# Altium PCB PCB2.PcbDoc (part 2 of 4)
Units mm, origin at the board's own origin, x right, y up, seen from the top; angles counter-clockwise.
Board outline 247 x 102 mm, 2 copper layers (Top Layer, Bottom Layer); 199 components, 195 nets, 863 pads, 110 vias.
Unrouted connection lines stored in the file: 60.
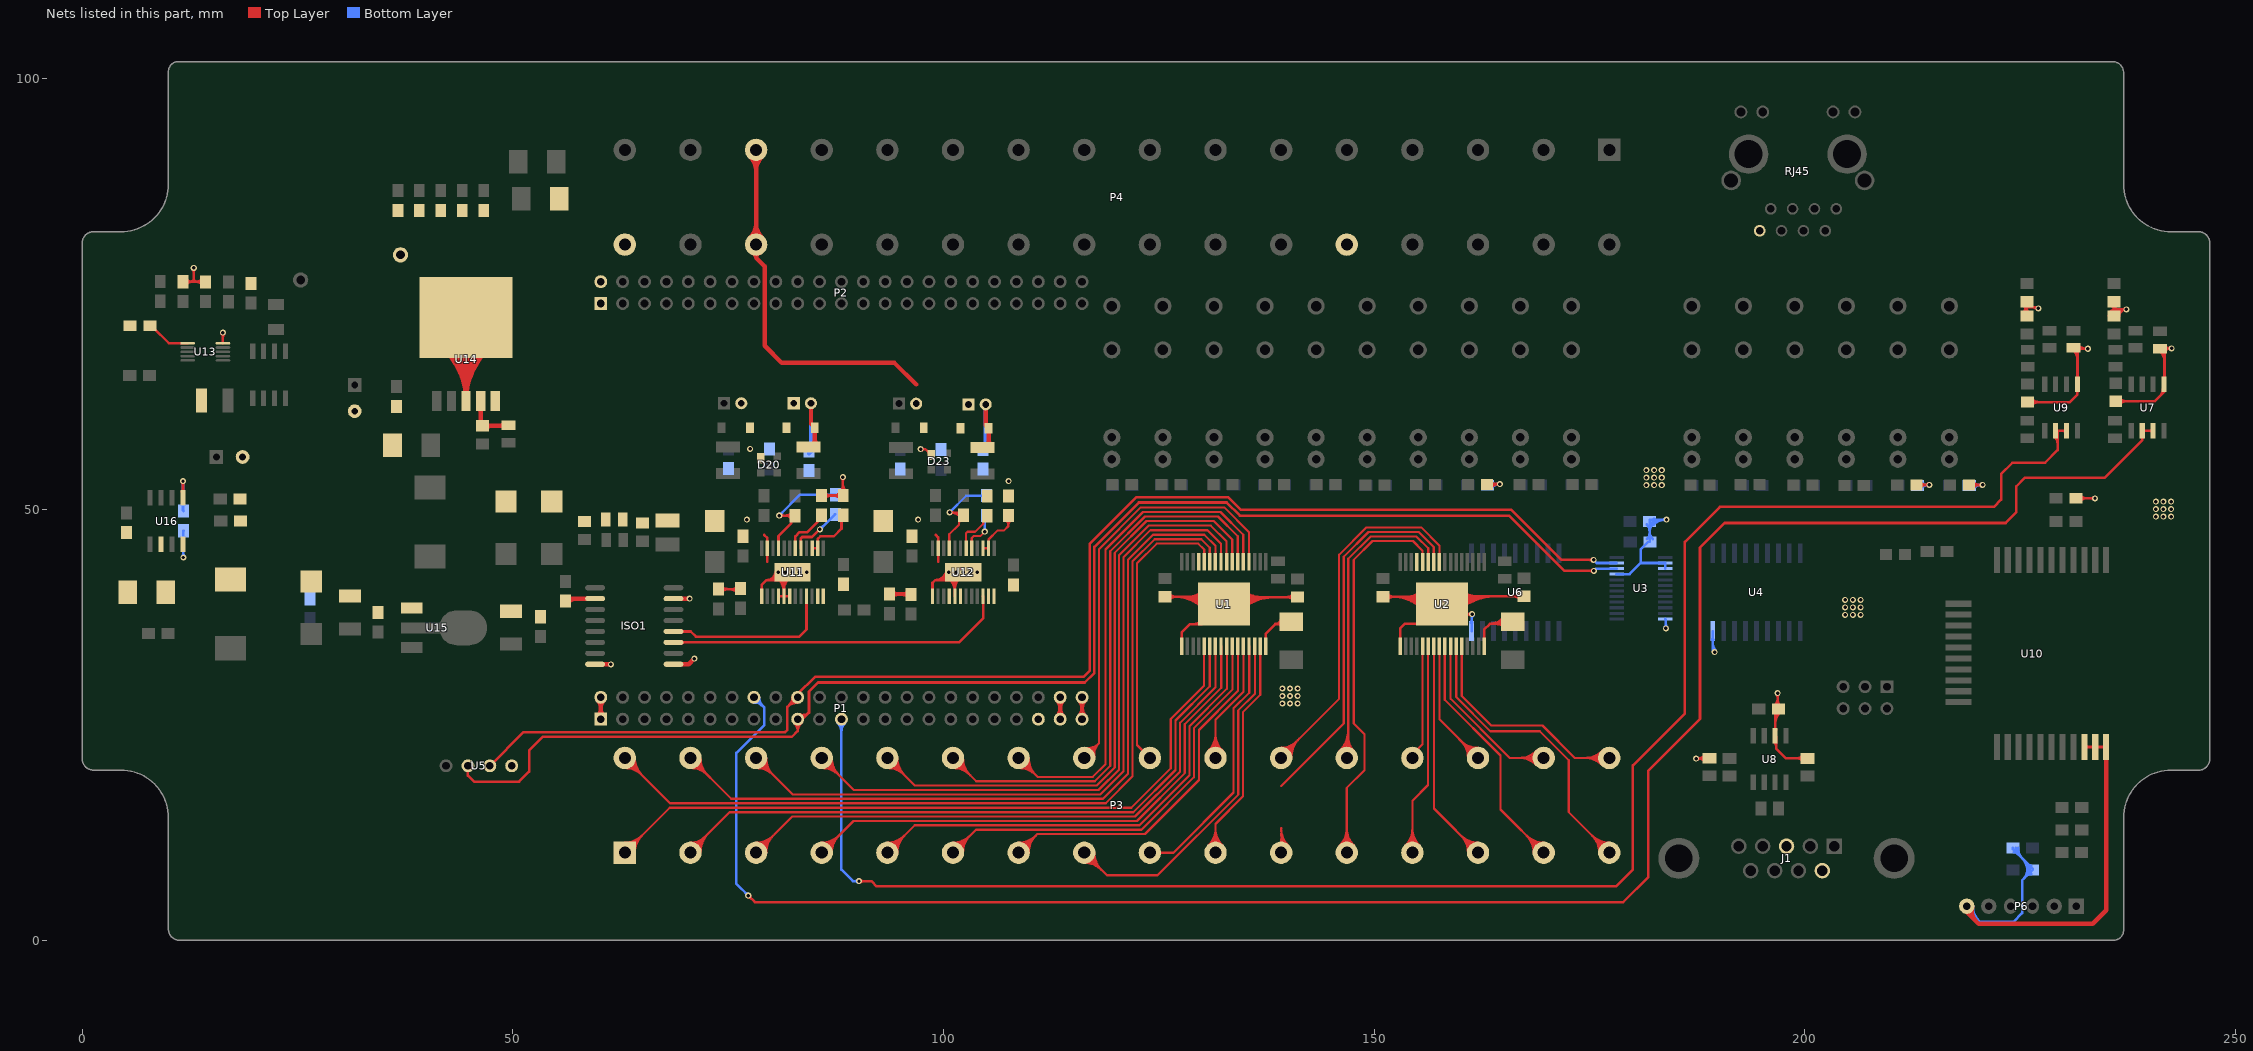
[diagram p2: the nets of this part, all layers, seen from the top]

## Via types
v1: diameter 0.7, hole 0.4, Top Layer to Bottom Layer, 110 vias

## Nets (pads, with @x,y where several pads share a name; then routed paths per layer and width w, separated by ;. In a path a pad name is that pad's centre, name@x,y a point inside that pad or via, vN(x,y) a via of type N, cw(c..) or ccw(c..) an arc to the next point about the centre after c; other vN are vias at no path point) (continued)
DGND: C1.1 C2.1 C3.1 C4.1 C5.2 C6.2 C7.2 C8.1 C9.1 C10.2 C11.1 C12.1 C13.2 C14.1 C15.1 C16.1 C30.2 C38.1 C39.1 C40.1 C41.1 C42.1 C43.2 C44.2 C45.2 C47.2 C48.2 C49.2 C52.1 C53.2 C54.1 C55.1 C57.2 C58.2 C59.1 C60.2 C61.2 CA1.2 CA2.2 D27.2 D28.2 D29.2 ISO1.2 ISO1.8 J1.3 J1.6 L3.1 P1.1 P1.2 P1.43 P1.44 P1.45 P1.46 P2.1 P2.2 P4.10 P4.32 P6.6 R20.2 R23.2 R26.1 R30.2 R49.1 R50.1 R55.2 RJ45.8 TP2.1 U1.0 U1.1 U2.0 U2.1 U3.2 U3.3 U3.12 U3.21 U4.9 U5.4 U6.9 U7.5 U8.2 U9.5 U10.30 U10.31 U10.32 U13.5 U14.0 U14.3 U14.5 U15.1 U16.6 | length 430.1
  Top Layer w0.3: R50.1@11.68,76.45 14.27,76.45 R49.1@14.28,76.44 ; R50.1@12.023,76.107 cw(c12.851,75.279) 12.851,76.45 cw(c12.851,77.621) R50.1@12.023,76.793 ; 12.66,76.45 12.94,76.73 ; v1@12.799,77.919 cw(c12.457,77.577) 12.94,77.577 cw(c13.423,77.577) v1@13.081,77.919 ; v1(12.94,78.06) 12.94,76.73 ; 13.085,76.45 cw(c13.085,75.245) R49.1@13.937,76.097 ; 13.133,76.45 ccw(c13.133,77.587) R49.1@13.937,76.783 ; 13.22,76.45 12.94,76.73 ; v1@16.189,70.389 cw(c15.847,70.047) 16.33,70.047 cw(c16.813,70.047) v1@16.471,70.389 ; U13.5@16.33,69.31 v1(16.33,70.53) ; C3.1@125.7,39.88 129.45,39.88 ; C3.1@126.154,39.526 cw(c127.007,38.673) 127.007,39.88 cw(c127.007,41.087) C3.1@126.154,40.234 ; 126.883,39.88 cw(c126.883,35.276) U1.0@130.598,37.996 ; 127.475,39.88 cw(c127.475,35.709) U1.0@130.84,38.173 ; U1.1@127.66,34.13 127.66,35.77 128.57,36.68 129.92,36.68 U1.0@129.94,36.7 ; 128.066,39.88 cw(c128.066,36.142) U1.0@131.082,38.351 ; 128.389,39.88 ccw(c128.389,42.651) U1.0@130.348,40.692 ; 128.658,39.88 cw(c128.658,36.575) U1.0@131.324,38.528 ; 128.899,36.68 ccw(c128.899,38.221) U1.0@129.989,37.131 ; 129.113,39.88 ccw(c129.113,41.927) U1.0@130.56,40.48 ; 129.249,39.88 cw(c129.249,37.008) U1.0@131.566,38.705 ; U1.0@129.61,39.72 129.45,39.88 ; U1.0@129.61,40.04 129.45,39.88 ; U1.0@129.623,36.68 ccw(c129.623,37.497) U1.0@130.201,36.919 ; U1.0@129.96,40.179 cw(c129.45,40.464) 129.45,39.88 ; U1.0@133.237,38.853 cw(c135.619,36.471) 135.619,39.84 ; U1.0@133.449,38.641 cw(c136.343,35.747) 136.343,39.84 ; U1.0@133.661,38.429 cw(c137.068,35.022) 137.068,39.84 ; U1.0@133.873,38.217 cw(c137.792,34.298) 137.792,39.84 ; U1.0@134.085,38.005 cw(c138.516,33.574) 138.516,39.84 ; U1.0@134.51,40.48 ccw(c136.054,42.024) 136.054,39.84 ; U1.0@134.722,40.692 ccw(c136.778,42.748) 136.778,39.84 ; U1.0@135.15,39.84 C1.1@141.11,39.84 ; C1.1@140.656,39.486 ccw(c139.803,38.633) 139.803,39.84 ccw(c139.803,41.047) C1.1@140.656,40.194 ; C4.1@151.04,39.88 154.79,39.88 ; C4.1@151.494,39.526 cw(c152.347,38.673) 152.347,39.88 cw(c152.347,41.087) C4.1@151.494,40.234 ; 152.218,39.88 cw(c152.218,35.274) U2.0@155.944,37.981 ; 152.807,39.88 cw(c152.807,35.702) U2.0@156.187,38.158 ; U2.1@153.01,34.11 153.01,36.21 153.55,36.75 U2.0@155.17,36.75 ; 153.395,39.88 cw(c153.395,36.129) U2.0@156.43,38.334 ; 153.787,39.88 ccw(c153.787,42.583) U2.0@155.698,40.672 ; 153.984,39.88 cw(c153.984,36.557) U2.0@156.672,38.51 ; 154.511,39.88 ccw(c154.511,41.859) U2.0@155.91,40.46 ; 154.573,39.88 cw(c154.573,36.985) U2.0@156.915,38.687 ; U2.0@155.09,39.58 154.79,39.88 ; U2.0@155.09,40.18 154.79,39.88 ; U2.0@155.327,40.189 cw(c154.79,40.501) 154.79,39.88 ; U2.0@158.587,38.833 cw(c161.235,36.185) 161.235,39.93 ; U2.0@158.799,38.621 cw(c161.959,35.461) 161.959,39.93 ; U2.0@159.011,38.409 cw(c162.683,34.737) 162.683,39.93 ; U2.0@159.223,38.197 cw(c163.407,34.013) 163.407,39.93 ; U2.0@159.435,37.985 cw(c164.132,33.288) 164.132,39.93 ; U2.0@159.86,40.46 ccw(c161.138,41.738) 161.138,39.93 ; U2.0@160.072,37.348 cw(c161.283,36.137) v1@161.283,37.85 ; U2.0@160.072,40.672 ccw(c161.862,42.462) 161.862,39.93 ; U2.0@160.391,40.275 ccw(c161.02,40.677) 161.02,39.93 ; U2.0@160.66,37.86 160.67,37.85 v1(161.36,37.85) ; U2.0@160.7,39.44 160.7,39.61 161.02,39.93 ; U2.0@160.7,40.25 161.02,39.93 ; v1@161.219,37.709 ccw(c160.877,37.367) 160.877,37.85 ccw(c160.877,38.333) v1@161.219,37.991 ; C2.1@166.926,39.576 ccw(c166.073,38.723) 166.073,39.93 ccw(c166.073,41.137) C2.1@166.926,40.284 ; C2.1@167.38,39.93 161.02,39.93 ; v1(187.36,21.07) 188.66,21.07 R26.1@188.72,21.01 ; v1@187.439,21.07 ccw(c187.439,22.432) R26.1@188.402,21.469 ; v1@187.501,20.929 cw(c187.843,20.587) 187.843,21.07 cw(c187.843,21.553) v1@187.501,21.211 ; v1@187.709,21.07 cw(c187.709,20.09) R26.1@188.402,20.783 ; U8.2@196.44,23.024 cw(c195.91,22.493) 196.66,22.493 ; U8.2@196.44,24.436 ccw(c196.184,24.692) 196.546,24.692 ccw(c196.908,24.692) U8.2@196.652,24.436 ; C7.2@196.456,27.183 ccw(c195.529,28.11) 196.84,28.11 ; 196.546,25.059 cw(c198.58,25.059) C7.2@197.142,26.497 ; 196.546,25.783 cw(c197.856,25.783) C7.2@196.93,26.709 ; v1@196.699,28.539 cw(c196.357,28.197) 196.84,28.197 cw(c197.323,28.197) v1@196.981,28.539 ; 196.84,27.912 ccw(c197.871,27.912) C7.2@197.142,27.183 ; v1(196.84,28.68) 196.84,26.926 C7.2@196.986,26.78 ; C7.2@196.926,26.84 196.546,26.46 U8.2@196.546,23.73 196.66,23.616 196.66,22.27 197.814,21.116 R20.2@200.3,21.116 ; R20.2@199.792,20.773 ccw(c198.964,19.945) 198.964,21.116 ccw(c198.964,22.287) R20.2@199.792,21.459 ; C11.1@225.316,72.824 ccw(c224.415,73.725) C12.1@225.69,73.725 ; C12.1@225.316,73.776 cw(c224.415,72.875) C11.1@225.69,72.875 ; C11.1@225.69,72.971 cw(c226.829,72.971) C12.1@226.024,73.776 ; 225.69,73.33 225.84,73.48 226.99,73.48 v1(227.11,73.36) ; C12.1@225.69,73.629 ccw(c226.829,73.629) C11.1@226.024,72.824 ; C12.1@225.69,74.13 225.69,72.55 C11.1@225.77,72.47 ; C13.2@225.86,62.47 230.76,62.47 231.61,63.32 231.61,64.496 U9.5@231.654,64.54 231.654,68.326 R30.2@231.2,68.78 ; C13.2@226.314,62.116 cw(c227.167,61.263) 227.167,62.47 cw(c227.167,63.677) C13.2@226.314,62.824 ; 226.337,73.48 cw(c226.337,72.587) v1@226.969,73.219 ; R30.2@231.167,68.497 cw(c229.992,67.322) 231.654,67.322 ; R30.2@231.379,68.709 cw(c230.717,68.047) 231.654,68.047 ; C14.1@231.46,51.31 233.67,51.31 v1(233.68,51.3) ; R30.2@231.5,68.63 231.54,68.67 v1(232.85,68.67) ; U9.5@231.548,65.246 ccw(c231.292,65.502) 231.654,65.502 ccw(c232.016,65.502) U9.5@231.76,65.246 ; 231.61,63.472 cw(c232.121,63.472) U9.5@231.76,63.834 ; R30.2@231.733,68.497 cw(c232.15,68.08) 232.15,68.67 ; R30.2@231.733,69.063 ccw(c232.681,70.011) v1@232.681,68.67 ; C14.1@231.93,50.967 cw(c232.758,50.139) 232.758,51.31 cw(c232.758,52.481) C14.1@231.93,51.653 ; U10.30@232.48,22.393 U10.30@232.44,22.433 U10.32@234.98,22.433 ; U10.30@232.581,22.292 cw(c232.923,21.95) 232.923,22.433 cw(c232.923,22.916) U10.30@232.581,22.574 ; v1@232.709,68.529 ccw(c232.367,68.187) 232.367,68.67 ccw(c232.367,69.153) v1@232.709,68.811 ; 233.173,51.31 cw(c233.173,50.793) v1@233.539,51.159 ; 233.221,51.31 ccw(c233.221,51.759) v1@233.539,51.441 ; U10.31@233.569,22.292 ccw(c233.227,21.95) 233.227,22.433 ccw(c233.227,22.916) U10.31@233.569,22.574 ; U10.31@233.851,22.292 cw(c234.193,21.95) 234.193,22.433 cw(c234.193,22.916) U10.31@233.851,22.574 ; U10.32@234.839,22.292 ccw(c234.497,21.95) 234.497,22.433 ccw(c234.497,22.916) U10.32@234.839,22.574 ; C8.1@235.3,72.492 cw(c236.083,72.467) 236.083,73.25 ; C8.1@235.546,72.824 ccw(c234.693,73.677) 235.9,73.677 ccw(c237.107,73.677) C8.1@236.254,72.824 ; C9.1@235.546,73.776 cw(c234.693,72.923) 235.9,72.923 cw(c237.107,72.923) C9.1@236.254,73.776 ; C8.1@235.6,72.482 cw(c236.392,72.458) 236.392,73.25 ; C8.1@235.9,72.47 C9.1@235.9,74.13 ; C8.1@235.9,72.473 cw(c236.701,72.448) 236.701,73.25 ; C8.1@235.9,73.09 236.06,73.25 v1(237.32,73.25) ccw(c237.32,72.429) C8.1@236.5,72.455 ; C10.2@236.09,62.57 240.61,62.57 241.75,63.71 241.75,68.17 R23.2@241.24,68.68 241.28,68.72 v1(242.59,68.72) ; C8.1@236.2,72.464 cw(c237.011,72.439) v1@237.011,73.25 ; C10.2@236.544,62.216 cw(c237.397,61.363) 237.397,62.57 cw(c237.397,63.777) C10.2@236.544,62.924 ; v1@237.179,73.109 ccw(c236.837,72.767) 236.837,73.25 ccw(c236.837,73.733) v1@237.179,73.391 ; R23.2@241.207,68.397 cw(c239.897,67.087) 241.75,67.087 ; 241.252,63.212 ccw(c240.525,63.94) U7.5@241.554,63.94 ; R23.2@241.419,68.609 cw(c240.621,67.811) 241.75,67.811 ; U7.5@241.598,65.246 ccw(c241.23,65.614) 241.75,65.614 ; U7.5@241.704,64.54 U7.5@241.75,64.494 ; R23.2@241.773,68.397 cw(c242.552,67.618) v1@242.552,68.72 ; R23.2@241.773,68.963 ccw(c242.359,69.549) v1@242.359,68.72 ; v1@242.449,68.579 ccw(c242.107,68.237) 242.107,68.72 ccw(c242.107,69.203) v1@242.449,68.861
  Top Layer w0.5: U14.0@41.656,68.908 cw(c36.241,62.6) U14.3@44.555,62.6 ; U14.0@41.982,69.287 cw(c37.175,63.688) 44.555,63.688 cw(c51.934,63.688) U14.0@47.127,69.287 ; U14.0@42.307,69.667 cw(c38.109,64.776) 44.555,64.776 cw(c51,64.776) U14.0@46.802,69.667 ; U14.0@42.633,70.046 cw(c39.043,65.864) 44.555,65.864 cw(c50.066,65.864) U14.0@46.476,70.046 ; U14.0@42.959,70.426 cw(c39.977,66.953) 44.555,66.953 cw(c49.132,66.953) U14.0@46.15,70.426 ; U14.0@44.1,67.9 44.555,67.445 ; U14.0@44.182,67.85 cw(c44.149,67.446) 44.555,67.446 ; U14.3@44.353,63.416 ccw(c43.867,63.902) 44.555,63.902 ccw(c45.243,63.902) U14.3@44.756,63.416 ; U14.0@44.927,67.85 ccw(c44.961,67.446) 44.555,67.446 ; U14.0@45.009,67.9 44.555,67.445 ; U14.0@47.453,68.908 ccw(c52.868,62.6) U14.3@44.555,62.6 ; C30.2@56.1,39.374 56.381,39.655 ISO1.2@59.54,39.655 ; C30.2@56.372,39.229 cw(c57.401,38.2) 57.401,39.655 ; ISO1.8@59.54,32.035 59.545,32.03 v1(61.37,32.03) ; P1.1@59.844,26.012 ccw(c58.991,26.865) 60.198,26.865 ccw(c61.405,26.865) P1.1@60.552,26.012 ; P1.2@59.844,27.844 cw(c58.991,26.991) 60.198,26.991 cw(c61.405,26.991) P1.2@60.552,27.844 ; P1.1@60.198,25.658 P1.2@60.198,28.198 ; P1.43@113.184,26.012 ccw(c112.331,26.865) 113.538,26.865 ccw(c114.745,26.865) P1.43@113.892,26.012 ; P1.44@113.184,27.844 cw(c112.331,26.991) 113.538,26.991 cw(c114.745,26.991) P1.44@113.892,27.844 ; P1.43@113.538,25.658 P1.44@113.538,28.198 ; P1.45@115.724,26.012 ccw(c114.871,26.865) 116.078,26.865 ccw(c117.285,26.865) P1.45@116.432,26.012 ; P1.46@115.724,27.844 cw(c114.871,26.991) 116.078,26.991 cw(c117.285,26.991) P1.46@116.432,27.844 ; P1.45@116.078,25.658 P1.46@116.078,28.198 ; P6.6@218.8,3.95 218.8,3.29 220.17,1.92 233.42,1.92 234.98,3.48 U10.32@234.98,22.433 ; P6.6@218.935,3.915 ccw(c219.994,3.643) 219.22,2.87 ; P6.6@219.419,3.791 ccw(c220.979,3.389) 219.84,2.25 ; U14.3@44.555,62.599 44.555,67.445
  Bottom Layer w0.3: U6.9@161.209,36.847 ccw(c160.988,37.068) 161.3,37.068 ccw(c161.612,37.068) U6.9@161.391,36.847 ; U6.9@161.3,35.879 161.3,37.79 v1(161.36,37.85) ; 161.3,37.222 cw(c161.988,37.222) v1@161.501,37.709 ; U3.21@178.131,42.495 179.635,42.495 180.935,43.795 ; C5.2@181.623,48.267 cw(c180.795,47.439) 181.966,47.439 cw(c183.137,47.439) C5.2@182.309,48.267 ; C6.2@181.663,46.583 ccw(c180.932,47.314) 181.966,47.314 ; C6.2@181.77,46.22 180.935,45.385 180.935,43.795 ; 181.966,47.507 ccw(c183.273,47.507) C6.2@182.349,46.583 ; C6.2@182.006,46.24 181.966,46.28 181.966,48.79 182.006,48.83 v1(183.93,48.83) ; C5.2@182.224,48.479 cw(c183.071,47.632) 183.071,48.83 ; C5.2@182.436,48.267 cw(c183.795,46.908) v1@183.795,48.83 ; C5.2@182.436,48.953 ccw(c182.733,49.25) 182.733,48.83 ; v1@183.719,36.351 ccw(c183.377,36.693) 183.86,36.693 ccw(c184.343,36.693) v1@184.001,36.351 ; U3.12@183.769,37.295 183.86,37.204 v1(183.86,36.21) ; U3.3@183.769,43.145 U3.2@183.769,43.795 180.935,43.795 ; v1@183.789,48.689 ccw(c183.447,48.347) 183.447,48.83 ccw(c183.447,49.313) v1@183.789,48.971 ; U4.9@189.209,34.911 cw(c188.988,34.69) 189.3,34.69 cw(c189.612,34.69) U4.9@189.391,34.911 ; 189.3,33.754 ccw(c189.844,33.754) v1@189.459,33.369 ; 189.3,34.478 ccw(c190.568,34.478) v1@189.671,33.581 ; U4.9@189.3,35.879 189.3,33.67 v1(189.53,33.44) ; P6.6@218.8,3.211 cw(c218.8,2.151) 219.549,2.901 ; P6.6@218.8,3.95 218.8,3.65 220.31,2.14 224.21,2.14 225.22,3.15 225.22,6.96 C15.1@226.43,8.17 226.43,8.3 224.15,10.58 C16.1@224.15,10.7 ; P6.6@219.238,3.927 ccw(c220.764,3.846) 219.684,2.766 ; P6.6@219.538,3.911 ccw(c221.669,3.799) 220.16,2.29 ; C16.1@224.277,10.215 cw(c224.277,9.64) 224.683,10.047 ; C16.1@224.462,10.7 ccw(c225.505,10.7) 224.767,9.963 ; C16.1@224.762,10.7 ccw(c226.529,10.7) 225.28,9.45 ; 225.293,9.437 cw(c224.027,8.17) 225.818,8.17 cw(c224.34,8.17) 225.385,7.125 ; 225.692,7.432 cw(c226.303,6.821) C15.1@226.303,7.685 ; 225.805,8.925 cw(c225.051,8.17) 226.118,8.17 cw(c225.365,8.17) C15.1@225.897,7.637 ; 225.914,8.816 ccw(c226.303,9.205) C15.1@226.303,8.655
  other v1: 139.33,27.48 140.22,27.48 141.11,27.48 139.33,28.35 140.22,28.35 141.11,28.35 139.33,29.22 140.22,29.22 141.11,29.22 204.68,37.78 205.57,37.78 206.46,37.78 204.68,38.65 205.57,38.65 206.46,38.65 204.68,39.52 205.57,39.52 206.46,39.52 240.74,49.18 241.63,49.18 242.52,49.18 240.74,50.05 241.63,50.05 242.52,50.05 240.74,50.92 241.63,50.92 242.52,50.92 181.6,52.83 182.49,52.83 183.38,52.83 181.6,53.7 182.49,53.7 183.38,53.7 181.6,54.57 182.49,54.57 183.38,54.57
ENABLE1: P1.16 U7.2 U7.3 | length 238.3
  Top Layer w0.3: v1@77.32,4.97 cw(c77.32,4.487) 77.661,4.829 cw(c78.003,5.17) v1@77.52,5.17 ; v1(77.32,5.17) 78.08,4.41 178.91,4.41 181.82,7.32 181.82,19.68 187.82,25.68 187.82,45.57 190.69,48.44 223.3,48.44 224.554,49.694 224.554,52.704 225.52,53.67 234.8,53.67 239.164,58.034 U7.2@239.164,59.14 U7.3@240.434,59.14 ; U7.2@239.058,58.434 cw(c238.802,58.178) 239.164,58.178 cw(c239.526,58.178) U7.2@239.27,58.434 ; U7.2@239.27,59.034 cw(c239.526,58.778) 239.526,59.14 cw(c239.526,59.502) U7.2@239.27,59.246 ; U7.3@240.328,59.034 ccw(c240.072,58.778) 240.072,59.14 ccw(c240.072,59.502) U7.3@240.328,59.246
  Bottom Layer w0.3: v1@77.12,5.17 ccw(c76.637,5.17) 76.979,5.511 ccw(c77.32,5.853) v1@77.32,5.37 ; v1(77.32,5.17) 75.94,6.55 75.94,21.75 79.18,24.99 79.18,26.996 P1.16@77.978,28.198 ; P1.16@77.978,27.598 cw(c77.978,26.149) 79.002,27.174 cw(c80.027,28.198) P1.16@78.578,28.198
ENABLE2: P1.23 U9.2 U9.3 | length 210.3
  Top Layer w0.3: v1(90.18,6.85) 90.21,6.82 91.67,6.82 92.23,6.26 178.07,6.26 180.02,8.21 180.02,20.28 186.07,26.33 186.07,46.25 190.13,50.31 221.95,50.31 222.78,51.14 222.78,54.107 224.107,55.434 227.884,55.434 229.34,56.89 U9.2@229.34,59.14 ; v1@90.321,6.709 cw(c90.59,6.44) 90.59,6.82 ; v1@90.321,6.991 ccw(c90.735,7.405) 90.735,6.82 ; U9.2@229.008,58.434 cw(c228.205,57.632) 229.34,57.632 ; U9.2@229.114,59.14 U9.3@230.384,59.14 ; U9.2@229.22,59.034 cw(c229.476,58.778) 229.476,59.14 cw(c229.476,59.502) U9.2@229.22,59.246 ; U9.3@230.278,59.034 ccw(c230.022,58.778) 230.022,59.14 ccw(c230.022,59.502) U9.3@230.278,59.246
  Bottom Layer w0.3: P1.23@87.714,25.234 cw(c86.689,24.209) 88.138,24.209 cw(c89.587,24.209) P1.23@88.562,25.234 ; P1.23@88.138,25.658 88.138,8.192 89.48,6.85 v1(90.18,6.85) ; v1@90.039,6.709 ccw(c89.697,6.367) 89.697,6.85 ccw(c89.697,7.333) v1@90.039,6.991
GND_SIG: C17.2 C18.2 C19.2 C20.2 C21.2 C23.2 C24.2 C25.2 C26.2 C27.2 C28.2 C29.2 C31.2 C32.2 C34.2 C35.2 C36.2 C37.2 C50.1 C51.1 D20.1 D21.2 D22.2 D23.1 D24.2 D25.2 ISO1.9 ISO1.15 J2.2 J3.1 J4.2 J5.1 L3.2 P4.27 P4.28 R39.1 R43.1 U11.1 U11.4 U11.5 U11.6 U11.11 U11.12 U11.23 U11.25 U12.1 U12.4 U12.5 U12.6 U12.11 U12.12 U12.23 U12.25 | length 137.2
  Top Layer w0.254: v1(97.33,57.01) 97.88,57.01 D23.1@98.56,56.33 ; v1@97.488,56.852 cw(c97.868,56.472) 97.868,57.01 cw(c97.868,57.548) v1@97.488,57.168 ; 97.968,56.922 ccw(c98.333,57.288) D23.1@98.477,56.791 ; D23.1@98.175,56.715 cw(c97.965,56.505) D23.1@98.262,56.505 ; U12.25@100.577,42.055 cw(c98.83,40.309) U12.5@101.3,40.309 ; U12.25@100.756,42.235 cw(c99.443,40.922) 101.3,40.922 ; U12.25@100.936,42.415 cw(c100.057,41.535) 101.3,41.535 ; U12.5@101.3,39.944 101.3,42.26 U12.25@101.44,42.4 ; U12.5@101.3,40.593 cw(c103.368,40.593) U12.25@101.906,42.055 ; 101.3,41.206 cw(c102.755,41.206) U12.25@101.726,42.235 ; C35.2@107.51,51.566 C35.2@107.53,51.586 ; R43.1@107.81,40.96 R43.1@108.11,41.26
  Top Layer w0.3: C21.2@73.86,40.756 76.35,40.756 C20.2@76.825,41.231 ; C21.2@74.203,40.413 cw(c75.031,39.585) 75.031,40.756 cw(c75.031,41.927) C21.2@74.203,41.099 ; 75.112,40.756 cw(c75.112,39.39) C20.2@76.077,40.356 ; 75.387,40.756 ccw(c75.387,41.732) C20.2@76.077,41.042 ; U11.1@78.881,39.944 78.881,41.231 79.46,41.81 ; 79.16,47.05 79.534,46.676 79.534,43.957 ; 79.78,41.81 ccw(c79.78,42.827) U11.25@80.796,42.761 ; 80.101,41.81 ccw(c80.101,42.806) U11.25@81.095,42.741 ; U11.25@80.421,41.81 ccw(c80.421,42.785) U11.25@81.394,42.721 ; U11.25@80.496,42.78 cw(c79.46,42.849) 79.46,41.81 ; U11.25@80.74,41.81 79.46,41.81 ; U11.25@80.742,41.81 ccw(c80.742,42.764) U11.25@81.694,42.701 ; U11.25@80.763,42.072 cw(c79.056,40.365) U11.5@81.47,40.365 ; U11.4@80.832,39.944 U11.6@82.133,39.944 ; U11.25@80.975,42.284 cw(c79.78,41.089) 81.47,41.089 ; U11.5@81.44,39.944 81.47,39.974 81.47,41.98 U11.25@81.5,42.01 ; U11.5@81.47,40.649 cw(c83.482,40.649) U11.25@82.059,42.072 ; 81.47,41.373 cw(c82.758,41.373) U11.25@81.847,42.284 ; C25.2@85.81,51.626 C24.2@88.35,51.626 88.3,51.676 v1(88.3,53.77) ; C25.2@86.153,51.283 cw(c86.981,50.455) 86.981,51.626 cw(c86.981,52.797) C25.2@86.153,51.969 ; R39.1@87.99,41.06 R39.1@88.05,41 ; C24.2@88.007,51.283 ccw(c87.179,50.455) 87.179,51.626 ccw(c87.179,52.797) C24.2@88.007,51.969 ; C24.2@88.007,52.096 ccw(c87.3,52.803) 88.3,52.803 ; v1@88.159,53.629 cw(c87.817,53.287) 88.3,53.287 cw(c88.783,53.287) v1@88.441,53.629 ; 88.3,53.045 ccw(c89.642,53.045) C24.2@88.693,52.096 ; U12.1@98.711,39.944 98.711,41.491 99.03,41.81 ; 99.1,47.04 99.364,46.776 99.364,43.957 ; 99.393,41.81 ccw(c99.393,43.075) U12.25@100.635,42.836 ; 99.756,41.81 ccw(c99.756,43.005) U12.25@100.93,42.78 ; 100.119,41.81 ccw(c100.119,42.935) U12.25@101.225,42.723 ; U12.25@100.341,42.893 cw(c99.03,43.145) 99.03,41.81 ; U12.25@100.482,41.81 ccw(c100.482,42.866) U12.25@101.519,42.667 ; U12.25@100.58,41.81 99.03,41.81 ; C35.2@107.51,51.566 C35.2@107.55,51.606
  Top Layer w0.5: ISO1.9@68.64,32.035 70.405,32.035 v1(71.06,32.69) ; ISO1.15@68.64,39.655 68.645,39.66 v1(70.51,39.66) ; P4.28@77.49,81.502 ccw(c75.697,83.295) 78.232,83.295 ccw(c80.767,83.295) P4.28@78.974,81.502 ; P4.27@77.49,91.018 cw(c75.697,89.225) 78.232,89.225 cw(c80.767,89.225) P4.27@78.974,91.018 ; P4.28@77.843,81.149 ccw(c76.904,82.088) 78.232,82.088 ccw(c79.56,82.088) P4.28@78.621,81.149 ; P4.27@77.843,91.371 cw(c76.904,90.432) 78.232,90.432 cw(c79.56,90.432) P4.27@78.621,91.371 ; P4.27@78.232,91.76 78.232,79.238 ; C31.2@93.72,40.186 96.2,40.186 C32.2@96.24,40.146 ; C31.2@93.992,39.914 cw(c94.649,39.257) 94.649,40.186 cw(c94.649,41.115) C31.2@93.992,40.458 ; 95.214,40.186 cw(c95.214,39.12) C32.2@95.968,39.874 ; 95.407,40.186 ccw(c95.407,40.979) C32.2@95.968,40.418 ; 96.82,64.51 94.3,67.03 81.22,67.03 79.24,69.01 79.24,78.23 78.232,79.238 ; 78.232,79.238 cw(c78.81,79.238) 78.605,79.778 ccw(c78.81,79.238) 78.232,79.238 ; 78.232,79.238 ccw(c77.654,79.238) 77.859,79.778 cw(c77.654,79.238) 78.232,79.238
  Bottom Layer w0.3: v1@97.29,56.97 v1(97.33,57.01) v1@97.374,56.966
  other v1: 80.79,42.72 81.615,42.72 82.44,42.72 83.265,42.72 84.09,42.72 100.62,42.72 101.445,42.72 102.27,42.72 103.095,42.72 103.92,42.72 77.15,48.82 97.05,48.82 107.55,53.3 77.54,57.04
GPIO_20: P1.41 U1.29 U2.29
I2C2_SCL: P1.19 U3.22 U5.2 | length 168.8
  Top Layer w0.3: U5.2@44.774,20.25 44.774,19.116 45.49,18.4 50.71,18.4 51.87,19.56 51.87,22.03 53.44,23.6 82.37,23.6 83.058,24.288 ; P1.19@82.651,25.217 cw(c81.794,24.288) 83.058,24.288 ; P1.19@83.172,25.935 ccw(c83.48,26.684) 84.052,26.112 ; P1.19@83.286,26.213 ccw(c83.665,27.135) 84.37,26.43 ; P1.19@83.465,25.217 ccw(c84.322,24.288) 83.058,24.288 ; v1@175.359,42.749 ccw(c175.017,42.407) 175.017,42.89 ccw(c175.017,43.373) v1@175.359,43.031 ; v1(175.5,42.89) 172.08,42.89 165.67,49.3 134.39,49.3 132.87,50.82 122.66,50.82 117.509,45.669 117.509,31.039 116.39,29.92 85.42,29.92 84.37,28.87 84.37,26.43 ; 83.058,24.288 P1.19@83.058,25.658 83.598,25.658 84.37,26.43
  Bottom Layer w0.3: v1(175.5,42.89) 175.755,43.145 U3.22@178.131,43.145
I2C2_SDA: P1.20 U3.23 U5.3 | length 161
  Top Layer w0.3: U5.3@47.314,20.25 51.218,24.154 81.594,24.154 81.86,24.42 81.86,27.07 82.988,28.198 P1.20@83.058,28.198 83.058,28.558 85.08,30.58 116.267,30.58 116.955,31.268 116.955,45.985 122.41,51.44 133.04,51.44 134.49,49.99 165.88,49.99 171.72,44.15 v1(175.47,44.15) ; 81.914,27.124 cw(c83.058,25.98) P1.20@83.058,27.598 ; 82.083,27.293 ccw(c81.178,28.198) P1.20@82.458,28.198 ; 82.426,27.636 cw(c83.058,27.005) P1.20@83.058,27.898 ; v1@175.329,44.009 ccw(c174.987,43.667) 174.987,44.15 ccw(c174.987,44.633) v1@175.329,44.291
  Bottom Layer w0.3: v1(175.47,44.15) 175.825,43.795 U3.23@178.131,43.795
IN_PIN0: P3.1 U1.5 | length 93.7
  Top Layer w0.254: P3.1@62.992,10.16 68.202,15.37 121.8,15.37 126.38,19.95 126.38,25.68 130.24,29.54 U1.5@130.24,34.13 ; P3.1@62.992,10.825 ccw(c62.992,12.43) 64.127,11.295 ccw(c65.262,10.16) P3.1@63.657,10.16 ; P3.1@62.992,11.079 ccw(c62.992,13.298) 64.561,11.729 ccw(c66.13,10.16) P3.1@63.911,10.16 ; P3.1@62.992,11.333 ccw(c62.992,14.165) 64.994,12.162 ccw(c66.997,10.16) P3.1@64.165,10.16
IN_PIN1: P3.2 U1.27 | length 109.9
  Top Layer w0.254: P3.2@62.992,19.987 cw(c62.992,17.155) 64.994,19.158 cw(c66.997,21.16) P3.2@64.165,21.16 ; P3.2@62.992,20.241 cw(c62.992,18.022) 64.561,19.591 cw(c66.13,21.16) P3.2@63.911,21.16 ; P3.2@62.992,20.495 cw(c62.992,18.89) 64.127,20.025 cw(c65.262,21.16) P3.2@63.657,21.16 ; P3.2@62.992,21.16 68.242,15.91 118.83,15.91 121.94,19.02 121.94,43.99 124.51,46.56 129.93,46.56 130.91,45.58 U1.27@130.91,43.93
IN_PIN2: P3.3 U1.6 | length 86.9
  Top Layer w0.254: P3.3@70.612,10.16 70.612,10.332 75.142,14.862 122.022,14.862 126.93,19.77 126.93,25.5 130.91,29.48 U1.6@130.91,34.13 ; P3.3@70.612,10.825 ccw(c70.612,12.015) 71.454,11.174 ; P3.3@70.612,11.079 ccw(c70.612,12.882) 71.887,11.607 ; P3.3@70.612,11.333 ccw(c70.612,13.75) 72.321,12.041 ; P3.3@71.277,10.16 cw(c73.298,10.16) 71.869,11.589 ; P3.3@71.531,10.16 cw(c74.165,10.16) 72.302,12.022 ; P3.3@71.785,10.16 cw(c75.032,10.16) 72.736,12.456
IN_PIN3: P3.4 U1.26 | length 103
  Top Layer w0.254: P3.4@70.612,19.987 cw(c70.612,17.155) 72.614,19.158 cw(c74.617,21.16) P3.4@71.785,21.16 ; P3.4@70.612,20.241 cw(c70.612,18.022) 72.181,19.591 cw(c73.75,21.16) P3.4@71.531,21.16 ; P3.4@70.612,20.495 cw(c70.612,18.89) 71.747,20.025 cw(c72.882,21.16) P3.4@71.277,21.16 ; P3.4@70.612,21.16 75.352,16.42 118.51,16.42 121.41,19.32 121.41,44.18 124.31,47.08 130.27,47.08 131.56,45.79 U1.26@131.56,43.93
IN_PIN4: P3.5 U1.7 | length 79.8
  Top Layer w0.254: P3.5@78.232,10.16 82.426,14.354 122.234,14.354 127.46,19.58 127.46,25.26 131.58,29.38 U1.7@131.58,34.13 ; P3.5@78.232,10.825 ccw(c78.232,12.43) 79.367,11.295 ccw(c80.502,10.16) P3.5@78.897,10.16 ; P3.5@78.232,11.079 ccw(c78.232,13.298) 79.801,11.729 ccw(c81.37,10.16) P3.5@79.151,10.16 ; P3.5@78.232,11.333 ccw(c78.232,14.165) 80.234,12.162 ccw(c82.237,10.16) P3.5@79.405,10.16
IN_PIN5: P3.6 U1.25 | length 96.2
  Top Layer w0.254: P3.6@78.232,19.987 cw(c78.232,17.155) 80.234,19.158 cw(c82.237,21.16) P3.6@79.405,21.16 ; P3.6@78.232,20.241 cw(c78.232,18.022) 79.801,19.591 cw(c81.37,21.16) P3.6@79.151,21.16 ; P3.6@78.232,20.495 cw(c78.232,18.89) 79.367,20.025 cw(c80.502,21.16) P3.6@78.897,21.16 ; P3.6@78.232,21.16 82.464,16.928 118.218,16.928 120.89,19.6 120.89,44.47 124.01,47.59 130.65,47.59 132.21,46.03 U1.25@132.21,43.93
IN_PIN6: P3.7 U1.8 | length 72.9
  Top Layer w0.254: P3.7@85.852,10.16 89.538,13.846 122.446,13.846 128,19.4 128,25.07 132.23,29.3 U1.8@132.23,34.13 ; P3.7@85.852,10.825 ccw(c85.852,12.43) 86.987,11.295 ccw(c88.122,10.16) P3.7@86.517,10.16 ; P3.7@85.852,11.079 ccw(c85.852,13.298) 87.421,11.729 ccw(c88.99,10.16) P3.7@86.771,10.16 ; P3.7@85.852,11.333 ccw(c85.852,14.165) 87.854,12.162 ccw(c89.857,10.16) P3.7@87.025,10.16
IN_PIN7: P3.8 U1.24 | length 89.4
  Top Layer w0.254: P3.8@85.852,19.987 cw(c85.852,17.155) 87.854,19.158 cw(c89.857,21.16) P3.8@87.025,21.16 ; P3.8@85.852,20.241 cw(c85.852,18.022) 87.421,19.591 cw(c88.99,21.16) P3.8@86.771,21.16 ; P3.8@85.852,20.495 cw(c85.852,18.89) 86.987,20.025 cw(c88.122,21.16) P3.8@86.517,21.16 ; P3.8@85.852,21.16 89.576,17.436 117.996,17.436 120.38,19.82 120.38,44.73 123.78,48.13 131.01,48.13 132.86,46.28 U1.24@132.86,43.93
IN_PIN8: P3.9 U1.9 | length 66
  Top Layer w0.254: P3.9@93.472,10.16 96.65,13.338 122.738,13.338 128.55,19.15 128.55,24.85 132.89,29.19 U1.9@132.89,34.13 ; P3.9@93.472,10.825 ccw(c93.472,12.43) 94.607,11.295 ccw(c95.742,10.16) P3.9@94.137,10.16 ; P3.9@93.472,11.079 ccw(c93.472,13.298) 95.041,11.729 ccw(c96.61,10.16) P3.9@94.391,10.16 ; P3.9@93.472,11.333 ccw(c93.472,14.165) 95.474,12.162 ccw(c97.477,10.16) P3.9@94.645,10.16
IN_PIN9: P3.10 U1.23 | length 82.6
  Top Layer w0.254: P3.10@93.472,19.987 cw(c93.472,17.155) 95.474,19.158 cw(c97.477,21.16) P3.10@94.645,21.16 ; P3.10@93.472,20.241 cw(c93.472,18.022) 95.041,19.591 cw(c96.61,21.16) P3.10@94.391,21.16 ; P3.10@93.472,20.495 cw(c93.472,18.89) 94.607,20.025 cw(c95.742,21.16) P3.10@94.137,21.16 ; P3.10@93.472,21.16 96.688,17.944 117.754,17.944 119.87,20.06 119.87,44.97 123.56,48.66 131.38,48.66 133.51,46.53 U1.23@133.51,43.93
IN_PIN10: P3.11 U1.10 | length 59.1
  Top Layer w0.254: P3.11@101.092,10.16 103.762,12.83 122.97,12.83 129.06,18.92 129.06,24.62 133.53,29.09 U1.10@133.53,34.13 ; P3.11@101.092,10.825 ccw(c101.092,12.43) 102.227,11.295 ccw(c103.362,10.16) P3.11@101.757,10.16 ; P3.11@101.092,11.079 ccw(c101.092,13.298) 102.661,11.729 ccw(c104.23,10.16) P3.11@102.011,10.16 ; P3.11@101.092,11.333 ccw(c101.092,14.165) 103.094,12.162 ccw(c105.097,10.16) P3.11@102.265,10.16
IN_PIN11: P3.12 U1.22 | length 75.9
  Top Layer w0.254: P3.12@101.092,19.987 cw(c101.092,17.155) 103.094,19.158 cw(c105.097,21.16) P3.12@102.265,21.16 ; P3.12@101.092,20.241 cw(c101.092,18.022) 102.661,19.591 cw(c104.23,21.16) P3.12@102.011,21.16 ; P3.12@101.092,20.495 cw(c101.092,18.89) 102.227,20.025 cw(c103.362,21.16) P3.12@101.757,21.16 ; P3.12@101.092,21.16 103.8,18.452 117.542,18.452 119.34,20.25 119.34,45.16 123.38,49.2 131.87,49.2 134.16,46.91 U1.22@134.16,43.93
IN_PIN12: P3.13 U1.11 | length 52.3
  Top Layer w0.254: P3.13@108.712,10.16 110.874,12.322 123.382,12.322 129.65,18.59 129.65,24.41 134.17,28.93 U1.11@134.17,34.13 ; P3.13@108.712,10.825 ccw(c108.712,12.43) 109.847,11.295 ccw(c110.982,10.16) P3.13@109.377,10.16 ; P3.13@108.712,11.079 ccw(c108.712,13.298) 110.281,11.729 ccw(c111.85,10.16) P3.13@109.631,10.16 ; P3.13@108.712,11.333 ccw(c108.712,14.165) 110.714,12.162 ccw(c112.717,10.16) P3.13@109.885,10.16
IN_PIN13: P3.14 U1.21 | length 68.8
  Top Layer w0.254: P3.14@108.712,19.987 cw(c108.712,17.155) 110.714,19.158 cw(c112.717,21.16) P3.14@109.885,21.16 ; P3.14@108.712,20.241 cw(c108.712,18.022) 110.281,19.591 cw(c111.85,21.16) P3.14@109.631,21.16 ; P3.14@108.712,20.495 cw(c108.712,18.89) 109.847,20.025 cw(c110.982,21.16) P3.14@109.377,21.16 ; P3.14@108.712,21.16 110.912,18.96 117.32,18.96 118.79,20.43 118.79,45.36 123.15,49.72 132.16,49.72 134.8,47.08 U1.21@134.8,44.15
IN_PIN14: P3.15 U1.14 | length 51.3
  Top Layer w0.254: P3.15@116.332,8.987 cw(c116.332,6.155) 118.334,8.158 cw(c120.337,10.16) P3.15@117.505,10.16 ; P3.15@116.332,9.241 cw(c116.332,7.022) 117.901,8.591 cw(c119.47,10.16) P3.15@117.251,10.16 ; P3.15@116.332,9.495 cw(c116.332,7.89) 117.467,9.025 cw(c118.602,10.16) P3.15@116.997,10.16 ; P3.15@116.332,10.16 118.962,7.53 124.83,7.53 134.2,16.9 134.2,26.68 136.15,28.63 U1.14@136.15,34.13
IN_PIN15: P3.16 U1.20 | length 57.1
  Top Layer w0.254: P3.16@116.332,21.16 118.04,22.868 ; P3.16@116.411,21.82 ccw(c116.538,22.89) 117.3,22.128 ccw(c118.062,21.366) P3.16@116.992,21.239 ; P3.16@116.441,22.073 ccw(c116.617,23.551) 117.67,22.498 ccw(c118.723,21.445) P3.16@117.245,21.269 ; P3.16@116.471,22.325 ccw(c116.696,24.212) 118.04,22.868 ; P3.16@117.497,21.299 cw(c119.384,21.524) 118.04,22.868 ; U1.20@135.46,43.93 135.46,47.36 132.57,50.25 122.89,50.25 118.04,45.4 118.04,22.868
IN_PIN16: P3.17 U1.13 | length 30.4
  Top Layer w0.254: P3.17@123.952,10.16 126.69,10.16 133.67,17.14 133.67,26.92 135.49,28.74 U1.13@135.49,34.13
IN_PIN17: P3.18 U1.28 | length 33.7
  Top Layer w0.254: P3.18@123.952,21.16 122.448,22.664 122.448,43.748 124.74,46.04 129.58,46.04 130.26,45.36 U1.28@130.26,43.93
IN_PIN18: P3.19 U1.15 | length 36.6
  Top Layer w0.254: P3.19@130.743,10.989 ccw(c128.74,12.992) 131.572,12.992 ccw(c134.404,12.992) P3.19@132.401,10.989 ; P3.19@130.922,10.81 ccw(c129.353,12.379) 131.572,12.379 ccw(c133.791,12.379) P3.19@132.222,10.81 ; P3.19@131.102,10.63 ccw(c129.967,11.765) 131.572,11.765 ccw(c133.177,11.765) P3.19@132.042,10.63 ; P3.19@131.572,10.16 131.572,13.502 134.75,16.68 134.75,26.46 136.77,28.48 U1.15@136.77,34.13
IN_PIN19: P3.20 U1.12 | length 24.8
  Top Layer w0.254: P3.20@130.743,21.989 ccw(c128.74,23.992) 131.572,23.992 ccw(c134.404,23.992) P3.20@132.401,21.989 ; P3.20@130.922,21.81 ccw(c129.353,23.379) 131.572,23.379 ccw(c133.791,23.379) P3.20@132.222,21.81 ; P3.20@131.102,21.63 ccw(c129.967,22.765) 131.572,22.765 ccw(c133.177,22.765) P3.20@132.042,21.63 ; P3.20@131.572,21.16 131.572,25.582 134.83,28.84 U1.12@134.83,34.13
IN_PIN20: P3.21 U2.26 | length 49
  Top Layer w0.254: 139.192,11.765 ccw(c140.797,11.765) P3.21@139.662,10.63 ; 139.192,12.379 ccw(c141.411,12.379) P3.21@139.842,10.81 ; 139.192,12.992 ccw(c142.024,12.992) P3.21@140.021,10.989 ; 139.192,17.892 146.45,25.15 146.45,44.52 149.33,47.4 155.16,47.4 156.91,45.65 U2.26@156.91,43.91
IN_PIN21: P3.22 U2.25 | length 52.6
  Top Layer w0.254: P3.22@139.192,21.16 139.192,21.312 145.92,28.04 145.92,44.75 149.1,47.93 155.45,47.93 157.56,45.82 U2.25@157.56,43.91 ; P3.22@139.192,21.825 ccw(c139.192,23.063) 140.068,22.188 ; P3.22@139.192,22.079 ccw(c139.192,23.931) 140.501,22.621 ; P3.22@139.192,22.333 ccw(c139.192,24.798) 140.935,23.055 ; P3.22@139.857,21.16 cw(c141.829,21.16) 140.435,22.555 ; P3.22@140.111,21.16 cw(c142.697,21.16) 140.868,22.988 ; P3.22@140.365,21.16 cw(c143.564,21.16) 141.302,23.422
IN_PIN22: P3.23 U2.28 | length 56.5
  Top Layer w0.254: P3.23@145.983,10.989 ccw(c143.98,12.992) 146.812,12.992 ccw(c149.644,12.992) P3.23@147.641,10.989 ; P3.23@146.162,10.81 ccw(c144.593,12.379) 146.812,12.379 ccw(c149.031,12.379) P3.23@147.462,10.81 ; P3.23@146.342,10.63 ccw(c145.207,11.765) 146.812,11.765 ccw(c148.417,11.765) P3.23@147.282,10.63 ; P3.23@146.812,10.16 146.812,17.682 148.88,19.75 148.88,23.89 147.61,25.16 147.61,44.16 149.79,46.34 154.49,46.34 155.61,45.22 U2.28@155.61,43.91
IN_PIN23: P3.24 U2.27 | length 46.6
  Top Layer w0.254: P3.24@145.983,21.989 ccw(c143.575,24.397) 146.98,24.397 ; P3.24@146.162,21.81 ccw(c144.188,23.784) 146.98,23.784 ; P3.24@146.342,21.63 ccw(c144.801,23.171) 146.98,23.171 ; P3.24@146.521,21.451 ccw(c145.414,22.558) 146.98,22.558 ; P3.24@146.812,21.16 146.98,21.328 146.98,44.28 149.58,46.88 154.89,46.88 156.26,45.51 U2.27@156.26,43.91 ; 146.98,22.973 ccw(c148.625,22.973) P3.24@147.462,21.81 ; 146.98,23.586 ccw(c149.238,23.586) P3.24@147.641,21.989
IN_PIN24: P3.25 U2.6 | length 35.2
  Top Layer w0.254: P3.25@153.603,10.989 ccw(c151.6,12.992) 154.432,12.992 ccw(c157.264,12.992) P3.25@155.261,10.989 ; P3.25@153.782,10.81 ccw(c152.213,12.379) 154.432,12.379 ccw(c156.651,12.379) P3.25@155.082,10.81 ; P3.25@153.962,10.63 ccw(c152.827,11.765) 154.432,11.765 ccw(c156.037,11.765) P3.25@154.902,10.63 ; P3.25@154.432,10.16 154.432,16.202 156.24,18.01 U2.6@156.24,34.11
IN_PIN25: P3.26 U2.5 | length 13.4
  Top Layer w0.254: P3.26@154.432,21.16 154.432,21.592 155.62,22.78 U2.5@155.62,34.11
IN_PIN26: P3.27 U2.7 | length 36.5
  Top Layer w0.254: U2.7@156.95,34.11 156.93,34.09 156.93,15.282 P3.27@162.052,10.16 ; P3.27@160.879,10.16 ccw(c158.047,10.16) 160.05,12.162 ccw(c162.052,14.165) P3.27@162.052,11.333 ; P3.27@161.133,10.16 ccw(c158.914,10.16) 160.483,11.729 ccw(c162.052,13.298) P3.27@162.052,11.079 ; P3.27@161.387,10.16 ccw(c159.782,10.16) 160.917,11.295 ccw(c162.052,12.43) P3.27@162.052,10.825
IN_PIN27: P3.28 U2.8 | length 25.3
  Top Layer w0.254: U2.8@157.57,34.11 157.57,25.642 P3.28@162.052,21.16 ; P3.28@160.879,21.16 ccw(c158.047,21.16) 160.05,23.162 ccw(c162.052,25.165) P3.28@162.052,22.333 ; P3.28@161.133,21.16 ccw(c158.914,21.16) 160.483,22.729 ccw(c162.052,24.298) P3.28@162.052,22.079 ; P3.28@161.387,21.16 ccw(c159.782,21.16) 160.917,22.295 ccw(c162.052,23.43) P3.28@162.052,21.825
IN_PIN28: P3.29 U2.9 | length 39.2
  Top Layer w0.254: U2.9@158.19,34.11 158.19,27.91 164.66,21.44 164.66,15.172 P3.29@169.672,10.16 ; P3.29@168.499,10.16 ccw(c165.667,10.16) 167.67,12.162 ccw(c169.672,14.165) P3.29@169.672,11.333 ; P3.29@168.753,10.16 ccw(c166.534,10.16) 168.103,11.729 ccw(c169.672,13.298) P3.29@169.672,11.079 ; P3.29@169.007,10.16 ccw(c167.402,10.16) 168.537,11.295 ccw(c169.672,12.43) P3.29@169.672,10.825
IN_PIN29: P3.30 U2.10 | length 30.2
  Top Layer w0.254: U2.10@158.81,34.11 158.87,34.05 158.87,28.02 165.73,21.16 P3.30@169.672,21.16 ; P3.30@168.843,20.331 ccw(c166.84,18.328) 166.84,21.16 ccw(c166.84,23.992) P3.30@168.843,21.989 ; P3.30@169.022,20.51 ccw(c167.453,18.941) 167.453,21.16 ccw(c167.453,23.379) P3.30@169.022,21.81 ; P3.30@169.202,20.69 ccw(c168.067,19.555) 168.067,21.16 ccw(c168.067,22.765) P3.30@169.202,21.63
IN_PIN30: P3.31 U2.11 | length 45.1
  Top Layer w0.254: U2.11@159.48,34.11 159.51,34.08 159.51,28.23 163.48,24.26 169.21,24.26 172.58,20.89 172.58,14.872 P3.31@177.292,10.16 ; P3.31@176.119,10.16 ccw(c173.287,10.16) 175.29,12.162 ccw(c177.292,14.165) P3.31@177.292,11.333 ; P3.31@176.373,10.16 ccw(c174.154,10.16) 175.723,11.729 ccw(c177.292,13.298) P3.31@177.292,11.079 ; P3.31@176.627,10.16 ccw(c175.022,10.16) 176.157,11.295 ccw(c177.292,12.43) P3.31@177.292,10.825
IN_PIN31: P3.32 U2.12 | length 36.3
  Top Layer w0.254: U2.12@160.1,34.11 160.16,34.05 160.16,28.36 163.6,24.92 169.53,24.92 173.29,21.16 P3.32@177.292,21.16 ; P3.32@176.463,20.331 ccw(c174.46,18.328) 174.46,21.16 ccw(c174.46,23.992) P3.32@176.463,21.989 ; P3.32@176.642,20.51 ccw(c175.073,18.941) 175.073,21.16 ccw(c175.073,23.379) P3.32@176.642,21.81 ; P3.32@176.822,20.69 ccw(c175.687,19.555) 175.687,21.16 ccw(c175.687,22.765) P3.32@176.822,21.63
MISO_AO: ISO1.11 U12.10 | length 40.3
  Top Layer w0.3: ISO1.11@68.64,34.575 101.805,34.575 104.59,37.36 104.59,39.917 U12.10@104.563,39.944 ; ISO1.11@69.596,34.469 cw(c69.852,34.213) 69.852,34.575 cw(c69.852,34.937) ISO1.11@69.596,34.681
MOSI_AO: ISO1.12 U11.9 | length 20.5
  Top Layer w0.3: ISO1.12@68.64,35.845 70.645,35.845 71.24,35.25 83.25,35.25 84.083,36.083 U11.9@84.083,39.944 ; ISO1.12@69.596,35.739 cw(c69.852,35.483) 69.852,35.845 cw(c69.852,36.207) ISO1.12@69.596,35.951
NetC5_1: 
NetC22_1: C22.1 R37.1 U11.21 | length 17
  Top Layer w0.3: U11.21@80.835,45.506 80.835,46.925 82.3,48.39 R37.1@82.3,49.2 ; v1(80.92,49.3) 82.73,49.3 R37.1@82.75,49.28 ; v1@81.061,49.159 cw(c81.403,48.817) 81.403,49.3 cw(c81.403,49.783) v1@81.061,49.441 ; 81.531,49.3 cw(c81.531,48.061) R37.1@82.407,48.937 ; 81.627,49.3 ccw(c81.627,50.403) R37.1@82.407,49.623
  Bottom Layer w0.3: v1(80.92,49.3) 83.34,51.72 C22.1@87.44,51.72 ; v1@80.92,49.5 ccw(c80.92,49.983) 81.261,49.641 ccw(c81.603,49.3) v1@81.12,49.3
NetC22_2: C22.2 U11.17 | length 7.1
  Top Layer w0.3: U11.17@83.436,45.506 83.436,46.666 83.58,46.81 84.71,46.81 85.545,47.645 v1@85.685,47.645
  Bottom Layer w0.3: v1(85.64,47.69) 87.384,49.434 C22.2@87.44,49.434 ; v1@85.64,47.89 ccw(c85.64,48.373) 85.981,48.031 ccw(c86.323,47.69) v1@85.84,47.69
NetC24_1: C24.1 U11.14 U11.15 | length 6.6
  Top Layer w0.3: U11.15@84.736,45.506 U11.14@85.386,45.506 85.386,46.576 85.71,46.9 87.27,46.9 88.15,47.78 88.15,49.14 C24.1@88.35,49.34
NetC25_1: C25.1 U11.18 | length 6.1
  Top Layer w0.3: U11.18@82.785,45.506 82.785,46.895 83.27,47.38 84.18,47.38 85.32,48.52 C25.1@85.32,49.36 ; C25.1@85.435,48.905 cw(c85.272,48.771) 85.422,48.622 cw(c85.696,48.347) C25.1@85.747,48.732
NetC26_1: C26.1 D22.1 J3.2 R40.2 | length 13.5
  Top Layer w0.5: J3.2@84.6,62.34 84.6,59.938 D22.1@85.038,59.5 85.038,57.488 R40.2@84.82,57.27 ; R40.2@84.79,57.526 ccw(c84.192,58.124) 85.038,58.124 ; D22.1@84.891,59.201 cw(c84.537,58.847) 85.038,58.847 cw(c85.538,58.847) D22.1@85.184,59.201 ; 85.038,58.243 ccw(c86.051,58.243) R40.2@85.334,57.526
  Bottom Layer w0.5: C26.1@84.37,56.5 84.6,56.73 J3.2@84.6,62.34
NetC33_1: C33.1 R42.1 U12.21 | length 17
  Top Layer w0.254: U12.21@100.665,45.506 100.665,47.125 101.79,48.25 R42.1@101.79,49.14 ; v1(100.69,49.66) 102.1,49.66 R42.1@102.2,49.56 ; v1(100.69,49.66) cw(c100.69,47.946) R42.1@101.94,49.119 ; v1@100.848,49.502 cw(c101.228,49.122) 101.228,49.66 cw(c101.228,50.198) v1@100.848,49.818 ; 101.277,49.66 cw(c101.277,48.497) R42.1@102.125,49.293 ; 101.55,49.66 ccw(c101.55,50.227) R42.1@101.951,49.826 ; 101.79,48.389 cw(c102.362,48.389) R42.1@102.326,48.959 ; R42.1@101.79,48.659 cw(c102.345,48.659) R42.1@102.31,49.213
  Bottom Layer w0.254: v1(100.69,49.66) 102.64,51.61 C33.1@105,51.61 ; v1@100.69,49.883 ccw(c100.69,50.421) 101.071,50.041 ccw(c101.451,49.66) v1@100.913,49.66
NetC33_2: C33.2 U12.17 | length 5.8
  Top Layer w0.254: U12.17@103.266,45.506 103.266,46.696 103.482,46.912 104.262,46.912 v1(104.78,47.43)
  Bottom Layer w0.254: v1@104.622,47.588 ccw(c104.242,47.968) 104.78,47.968 ccw(c105.318,47.968) v1@104.938,47.588 ; v1(104.78,47.43) 104.78,49.104 C33.2@105,49.324
NetC35_1: C35.1 U12.14 U12.15 | length 7.5
  Top Layer w0.254: U12.15@104.566,45.506 U12.14@105.216,45.506 105.216,46.526 106.27,47.58 107.03,47.58 107.53,48.08 ; C35.1@107.203,48.785 cw(c106.608,48.08) 107.53,48.08 ; C35.1@107.53,49.3 107.53,48.08 ; C35.1@107.858,48.785 ccw(c108.452,48.08) 107.53,48.08
NetC36_1: C36.1 U12.18 | length 5
  Top Layer w0.254: U12.18@102.615,45.506 102.615,47.265 102.77,47.42 103.66,47.42 104.6,48.36 C36.1@104.6,49.21
NetC37_1: C37.1 D25.1 J5.2 R44.2 | length 13.1
  Top Layer w0.5: R44.2@104.76,57.03 105.228,57.498 D25.1@105.228,59.45 104.89,59.788 J5.2@104.89,62.21 ; R44.2@104.99,57.456 ccw(c104.416,58.03) 105.228,58.03 ; D25.1@105.081,59.151 cw(c104.727,58.797) 105.228,58.797 cw(c105.728,58.797) D25.1@105.374,59.151 ; 105.228,58.197 ccw(c106.275,58.197) R44.2@105.534,57.456
  Bottom Layer w0.5: C37.1@104.55,56.98 104.89,57.32 J5.2@104.89,62.21
NetC45_1: C45.1 U13.6 | length 5.1
  Top Layer w0.3: C45.1@7.84,71.13 8.22,71.13 10.04,69.31 U13.6@12.23,69.31
NetC46_1: C46.1 R53.2 U14.4 | length 9.7
  Top Layer w0.5: U14.4@46.053,61.783 cw(c45.567,61.296) 46.255,61.296 cw(c46.943,61.296) U14.4@46.456,61.783 ; U14.4@46.255,62.599 46.255,59.916 C46.1@46.45,59.72 49.42,59.72 R53.2@49.47,59.77 ; C46.1@46.833,59.437 cw(c47.516,58.754) 47.516,59.72 cw(c47.516,60.686) C46.1@46.833,60.003 ; 48.375,59.72 ccw(c48.375,60.615) R53.2@49.008,59.982 ; 48.616,59.72 cw(c48.616,59.166) R53.2@49.008,59.558
NetC56_1: C56.1 U16.1 | length 7.6
  Top Layer w0.3: v1@11.549,53.169 cw(c11.207,52.827) 11.69,52.827 cw(c12.173,52.827) v1@11.831,53.169 ; U16.1@11.58,52.056 ccw(c11.315,52.321) 11.69,52.321 ; U16.1@11.686,51.35 11.69,51.354 v1(11.69,53.31) ; 11.69,52.303 ccw(c12.039,52.303) U16.1@11.792,52.056
  Bottom Layer w0.3: v1@11.549,53.169 cw(c11.207,52.827) 11.69,52.827 cw(c12.173,52.827) v1@11.831,53.169 ; v1(11.69,53.31) 11.69,49.89 C56.1@11.75,49.83
NetC56_2: C56.2 D29.1 L4.1 U16.8 | length 3.9
  Bottom Layer w0.3: v1@11.599,44.571 ccw(c11.257,44.913) 11.74,44.913 ccw(c12.223,44.913) v1@11.881,44.571 ; v1(11.74,44.43) 11.74,47.534 C56.2@11.75,47.544
NetD1_1: D1.1 U1.16 | length 7.9
  Top Layer w0.3: U1.16@137.41,34.13 137.41,35.59 138.53,36.71 ; 138.914,36.71 ccw(c138.914,37.28) D1.1@139.467,37.142 ; D1.1@139.176,37.215 cw(c138.53,37.376) 138.53,36.71 ; D1.1@139.415,36.339 ccw(c138.53,35.47) 138.53,36.71 ; D1.1@140.78,36.71 138.53,36.71
NetD2_1: D2.1 U2.16 | length 10.3
  Top Layer w0.3: U2.16@162.76,34.11 162.76,36.05 163.43,36.72 ; 164.017,36.72 ccw(c164.017,38.263) D2.1@165.268,37.359 ; 164.186,36.72 cw(c164.186,35.398) D2.1@165.121,36.333 ; 164.605,36.72 ccw(c164.605,37.839) D2.1@165.511,37.183 ; D2.1@165.025,37.535 cw(c163.43,38.688) 163.43,36.72 ; D2.1@165.41,36.72 163.43,36.72
NetD3_1: D3.1 R4.2 | length 8.6
  Top Layer w0.3: D3.1@163.093,52.887 163.156,52.95 v1(164.59,52.95) ; D3.1@163.501,52.544 cw(c164.481,51.564) v1@164.481,52.95 ; D3.1@163.501,53.23 ccw(c164.177,53.906) 164.177,52.95 ; v1@164.449,52.809 ccw(c164.107,52.467) 164.107,52.95 ccw(c164.107,53.433) v1@164.449,53.091
  Bottom Layer w0.3: R4.2@163.146,52.82 163.276,52.95 v1(164.59,52.95) ccw(c164.59,51.718) R4.2@163.645,52.509 ; R4.2@163.415,52.701 cw(c163.948,52.255) 163.948,52.95 ; R4.2@163.616,53.163 ccw(c164.13,53.677) 164.13,52.95 ; v1@164.449,52.809 ccw(c164.107,52.467) 164.107,52.95 ccw(c164.107,53.433) v1@164.449,53.091
NetD4_1: D4.1 R3.2 | length 8.7
  Top Layer w0.3: D4.1@218.73,52.86 v1(220.64,52.86) ; D4.1@219.471,52.524 cw(c220.282,51.713) 220.282,52.86 ; D4.1@219.471,53.21 ccw(c220.316,54.055) v1@220.316,52.86 ; v1@220.499,52.719 ccw(c220.157,52.377) 220.157,52.86 ccw(c220.157,53.343) v1@220.499,53.001
  Bottom Layer w0.3: R3.2@219.086,52.81 219.136,52.86 v1(220.64,52.86) ; R3.2@219.556,52.467 cw(c220.505,51.518) v1@220.505,52.86 ; R3.2@219.556,53.153 ccw(c220.263,53.86) 220.263,52.86 ; v1@220.499,52.719 ccw(c220.157,52.377) 220.157,52.86 ccw(c220.157,53.343) v1@220.499,53.001
NetD5_1: D5.1 R5.2 | length 8
  Top Layer w0.3: D5.1@212.933,52.847 212.946,52.86 v1(214.44,52.86) ; D5.1@213.341,52.504 cw(c214.2,51.645) v1@214.2,52.86 ; D5.1@213.341,53.19 ccw(c214.138,53.987) v1@214.138,52.86 ; v1@214.299,52.719 ccw(c213.957,52.377) 213.957,52.86 ccw(c213.957,53.343) v1@214.299,53.001
  Bottom Layer w0.3: R5.2@213.076,52.81 213.126,52.86 v1(214.44,52.86) ccw(c214.44,51.648) R5.2@213.556,52.478 ; R5.2@213.546,53.153 ccw(c214.253,53.86) v1@214.253,52.86 ; v1@214.299,52.719 ccw(c213.957,52.377) 213.957,52.86 ccw(c213.957,53.343) v1@214.299,53.001